# Altium PCB Main.PcbDoc
Units mil, origin at the board's own origin, x right, y up, seen from the top; angles counter-clockwise.
Board outline 2952.76 x 1929.13 mil, 4 copper layers (L1 (Signal), L2 (GND), L3 (PWR), L2 (Signal)), stack 53.912 mil thick; 67 components, 44 nets, 315 pads, 209 vias.
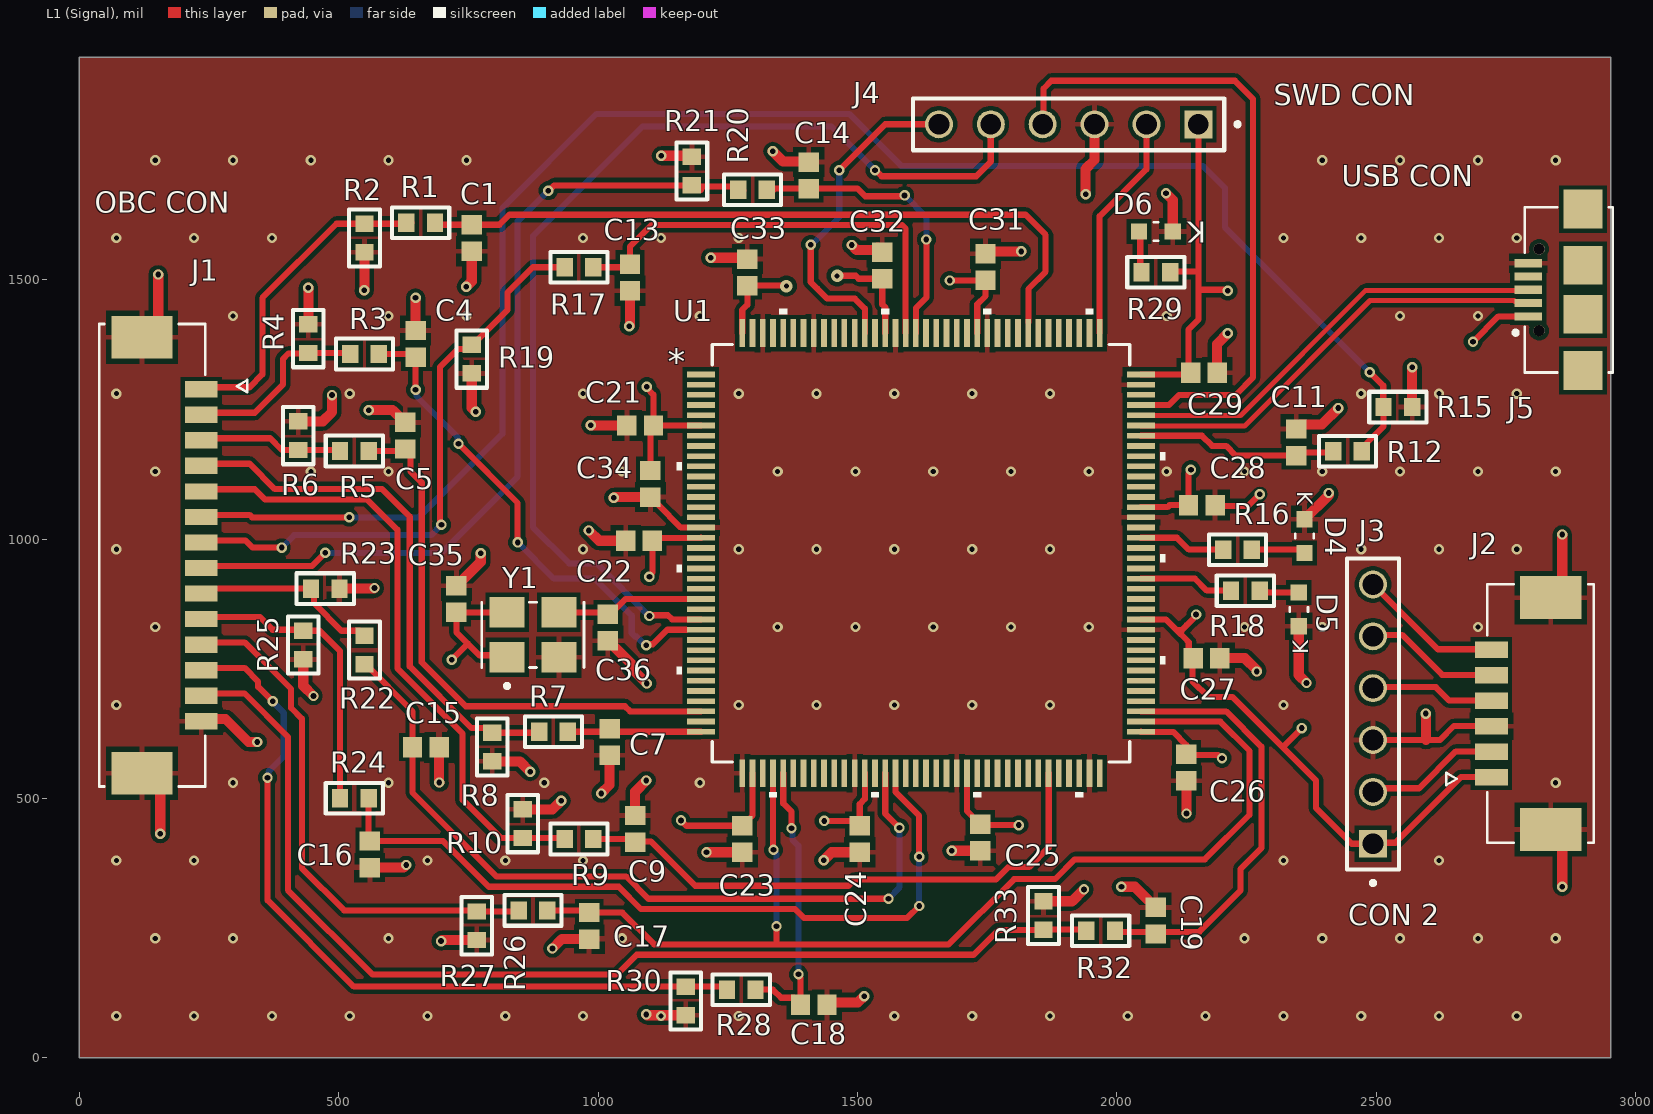
[diagram p0: L1 (Signal) view]
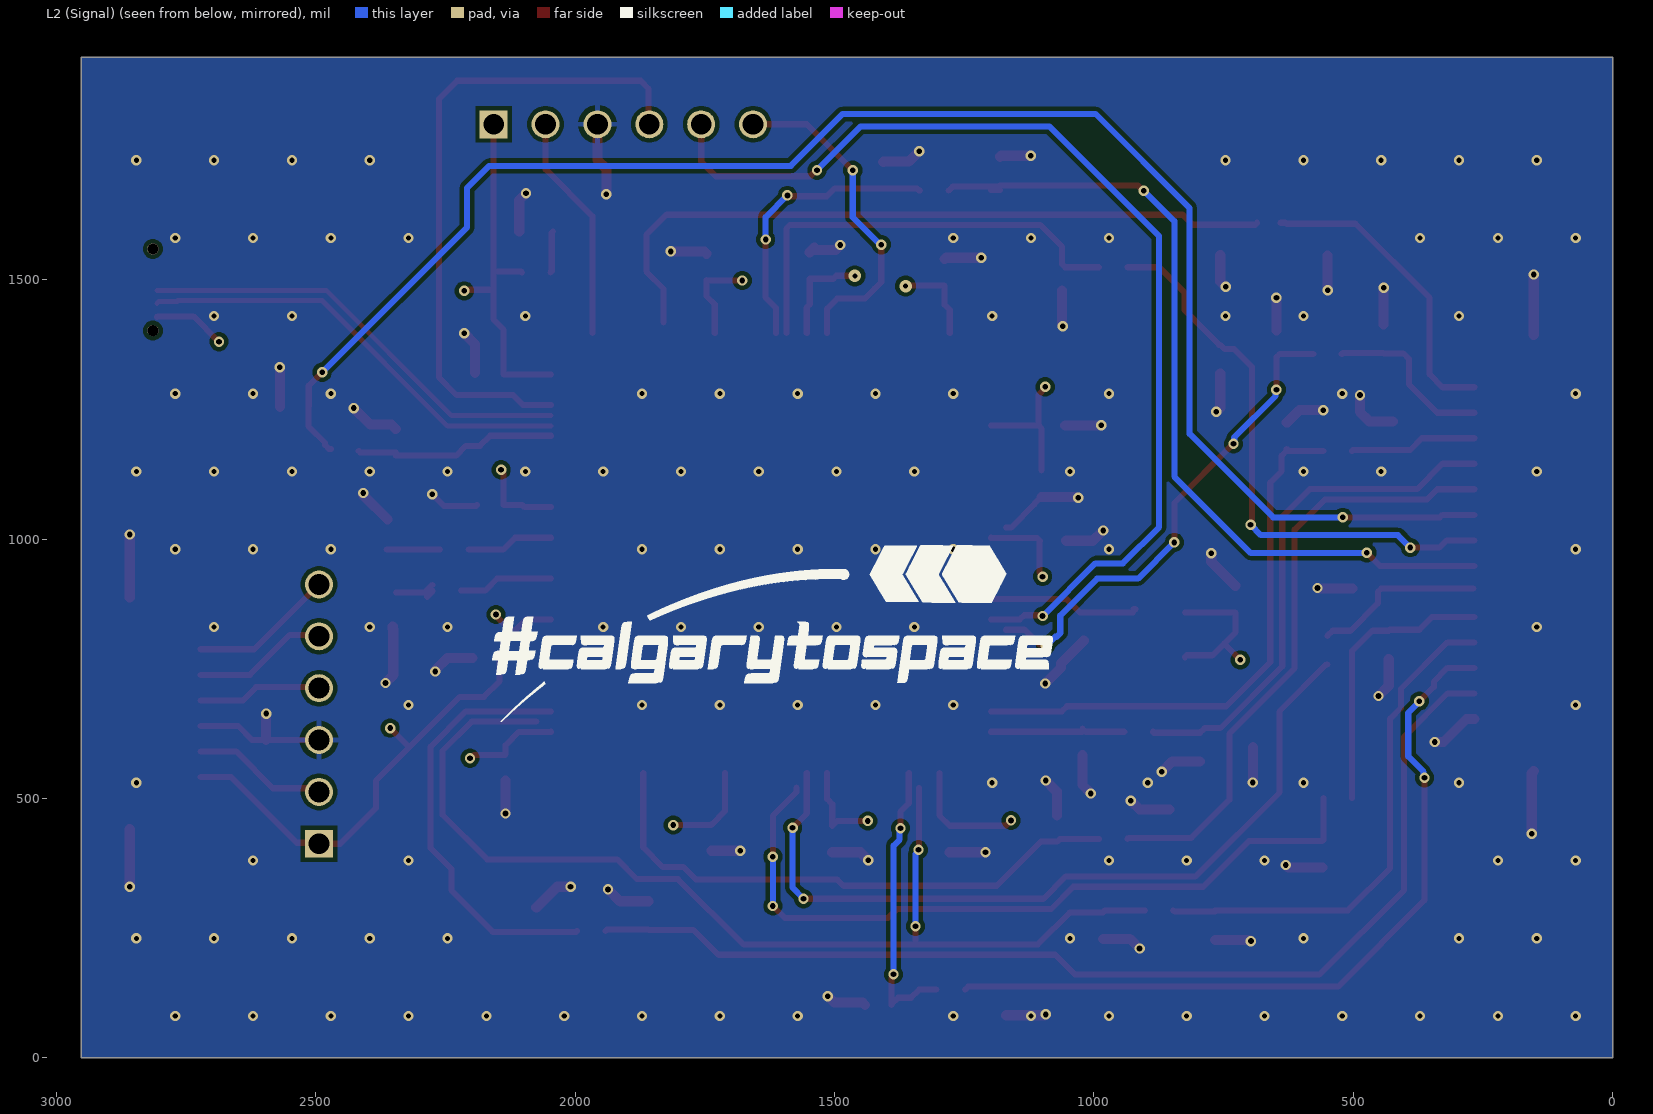
[diagram p1: L2 (Signal) view, seen from below]
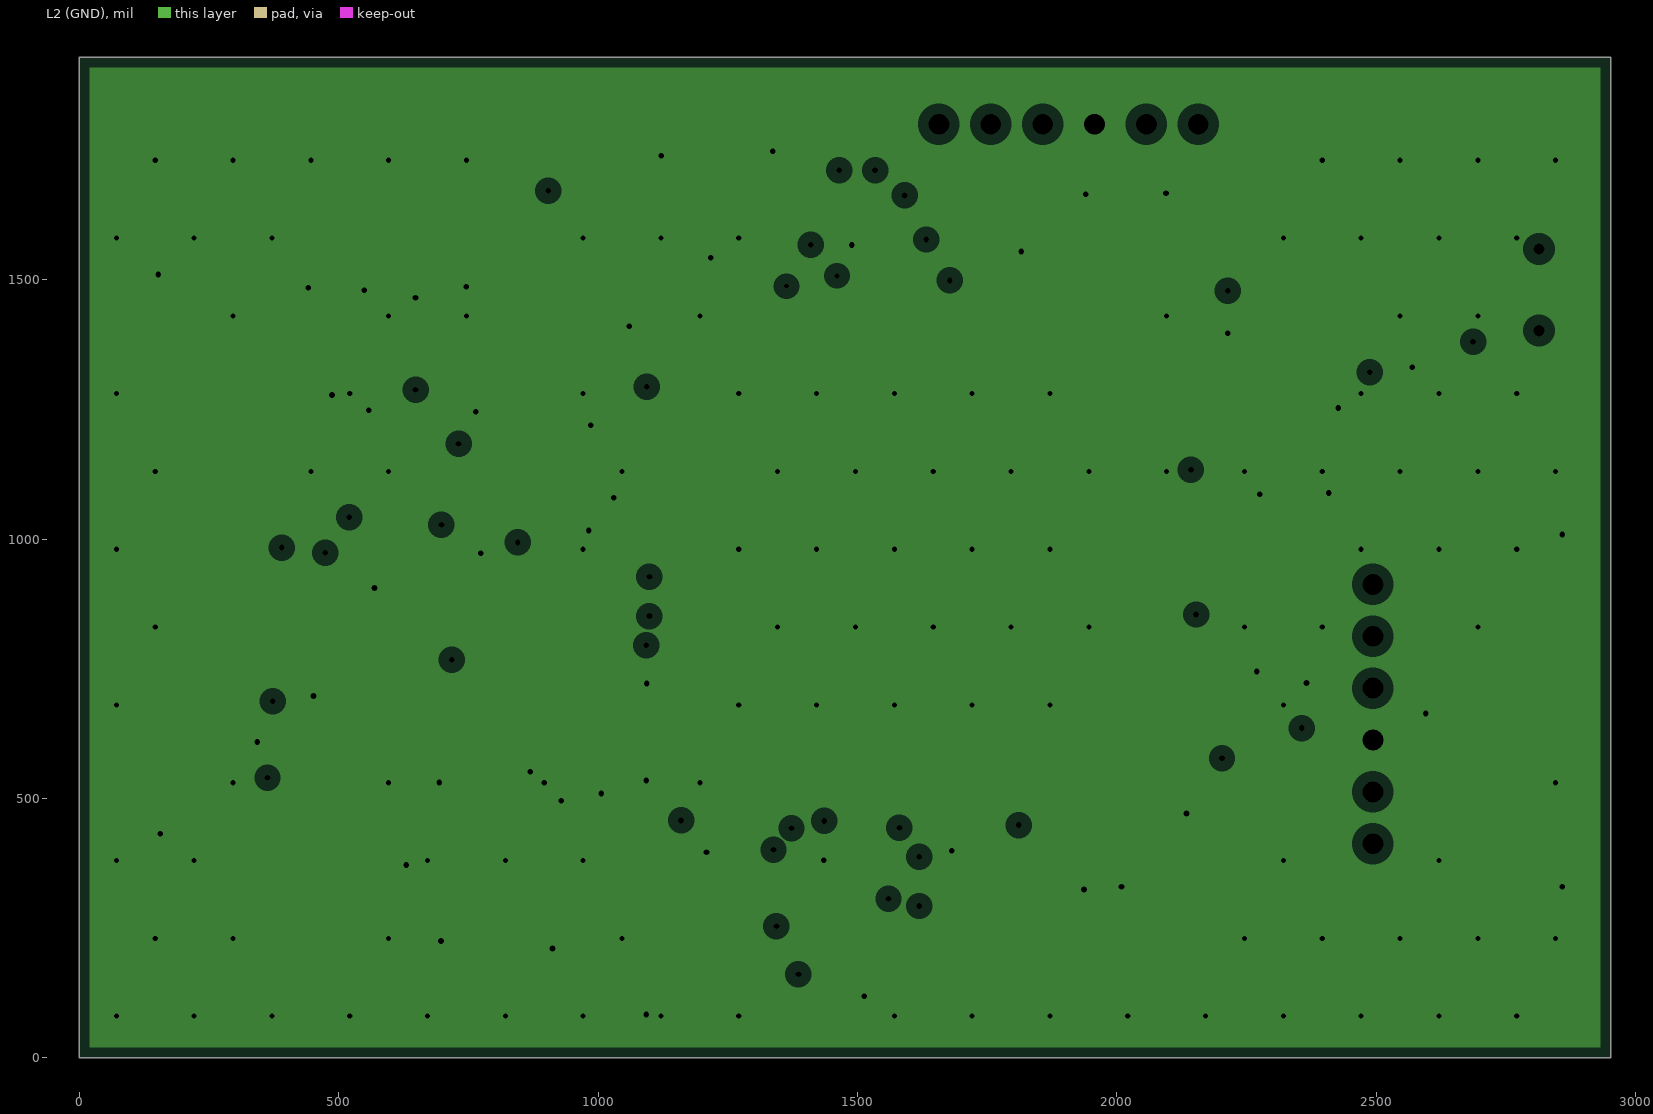
[diagram p2: L2 (GND), clearances drawn from the general rule]
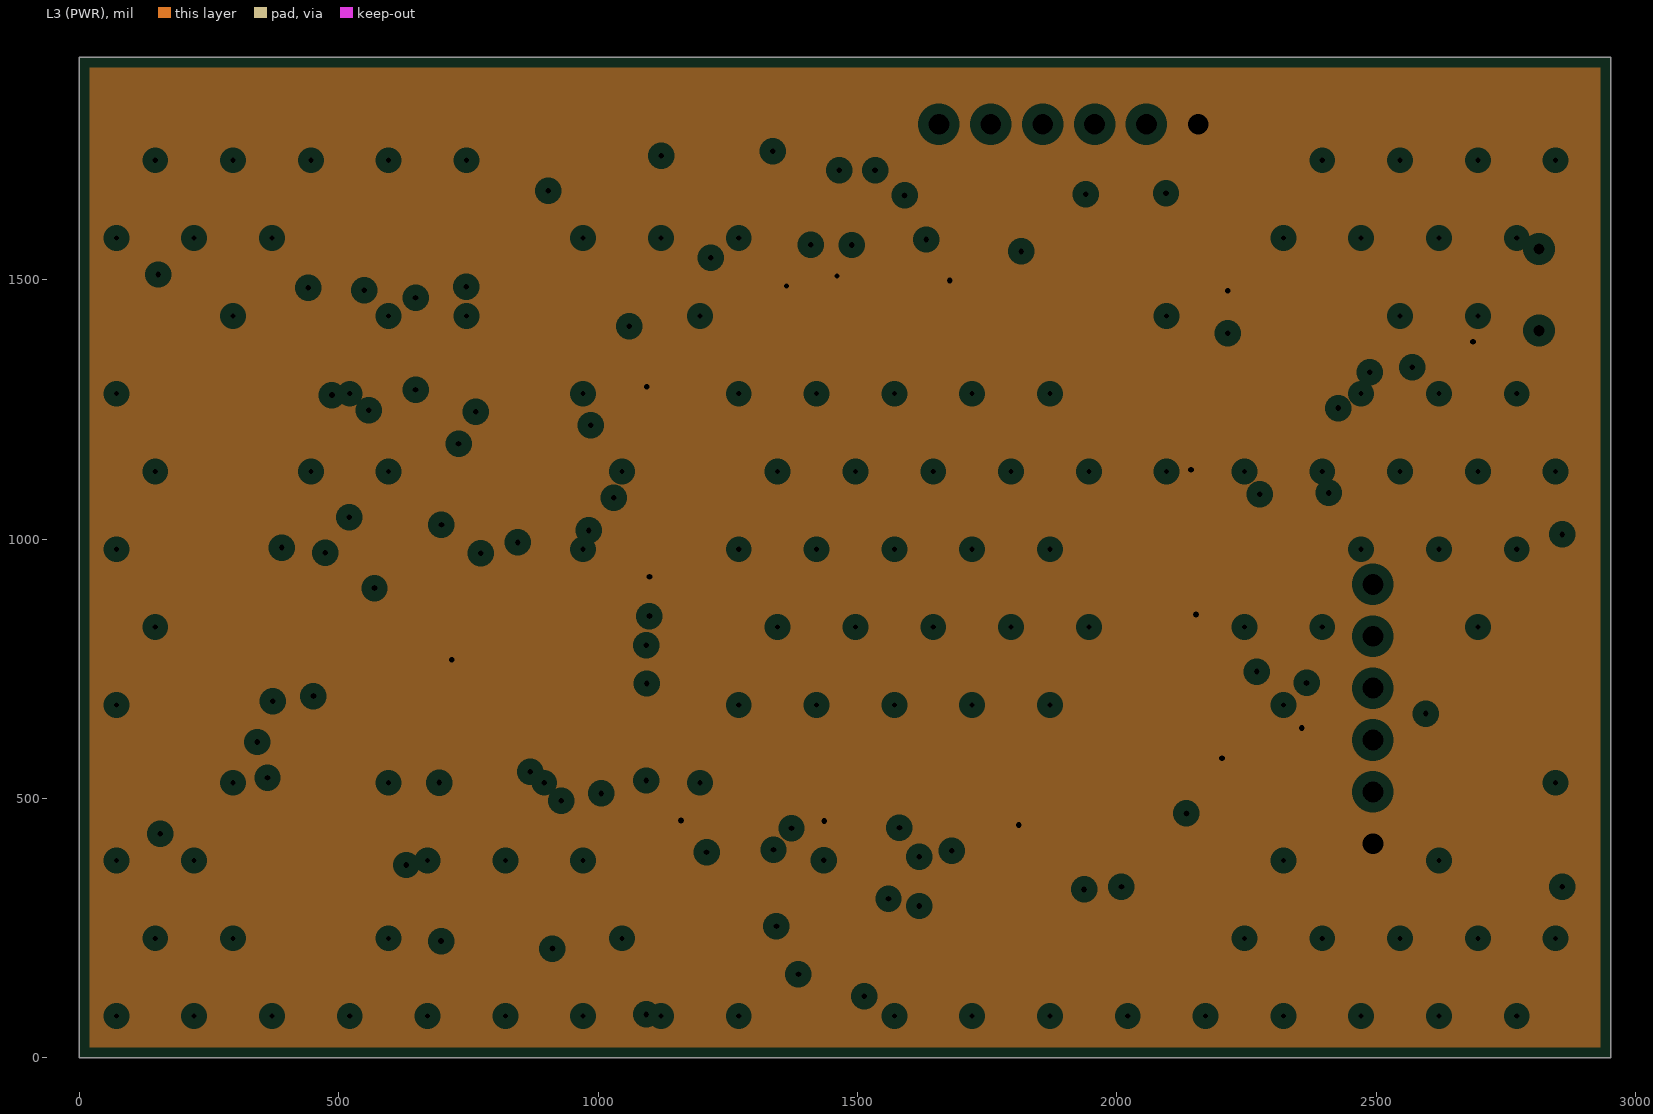
[diagram p3: L3 (PWR), clearances drawn from the general rule]

## Layer stack, top to bottom
Top Solder: solder mask 1, SM-001, Dk 4
L1 (Signal): signal copper 1.378
Dielectric 1: prepreg 5.1, PP-017, Dk 4.3
Dielectric 2: prepreg 5.1, PP-017, Dk 4.3
L2 (GND): plane copper 1.378, net GND
Dielectric 3: core 28, Core-039, Dk 4.8
L3 (PWR): plane copper 1.378, net 3V3
Dielectric 4: prepreg 5.1, PP-017, Dk 4.3
Dielectric 5: prepreg 5.1, PP-017, Dk 4.3
L2 (Signal): signal copper 1.378
Bottom Solder: solder mask 1, SM-001, Dk 4

## Board outline
0,0 2952.76,0 2952.76,1929.13 0,1929.13

## Design rules (kind name [scope] priority, off if disabled: settings)
Clearance [All] p1: gap=8 ignorepadtopadclearanceinfootprint=TRUE except(0: Arc-Hole Track-Hole SMDPad-Hole THPad-Hole Via-Hole Fill-Hole Poly-Hole Region-Hole Text-Hole)
DiffPairsRouting [All] p1: maxlimit=10 minlimit=10 mostfreqgap=10 toplayer_minwidth=9.84 toplayer_maxwidth=15 toplayer_prefwidth=15 bottomlayer_minwidth=9.84 bottomlayer_maxwidth=15 bottomlayer_prefwidth=15 maxuncoupledlength=500
PlaneClearance [All] p1: clearance=20
PlaneConnect [All] p1: planeconnectstyle=Relief reliefexpansion=20 reliefentries=4 reliefconductorwidth=10 reliefairgap=10
PolygonConnect [All] p1: connectstyle=Relief reliefconductorwidth=10 reliefentries=4 polygonreliefangle="90 Angle" airgapwidth=10
RoutingVias [All] p1: holewidth=28 width=50 viastyle="Through Hole" minholewidth=5 minwidth=5 maxholewidth=28 maxwidth=50
SolderMaskExpansion [All] p1: expansion=4 istentingtop=FALSE
Width Power [All] p1: maxlimit=19.68 minlimit=11.81 preferedwidth=19.68 minimp=50.000000 maximp=50.000000 favimp=50.000000
Width [All] p2: maxlimit=10 minlimit=10 preferedwidth=10
27 further rules are at their usual default settings.

## Classes and differential pairs
differential pair USB_D: +USB_D_P -USB_D_N

## Components (designator, comment, footprint, x,y, rotation, side; value= is the part's Value field where it differs from the comment)
C1 "100pF" CAPC1608X95X40NL15T15 756.45,1580.75 r90 top
C4 "100pF" CAPC1608X95X40NL15T15 648.18,1376.9 r270 top
C5 "100pF" CAPC1608X95X40NL15T15 628.5,1199.73 r270 top
C7 "100pF" CAPC1608X95X40NL15T15 1022.2,609.18 r90 top
C9 "100pF" CAPC1608X95X40NL15T15 1071.41,441.86 r270 top
C11 "100pF" CAPC1608X95X40NL15T15 2346,1187 r270 top
C13 "100pF" CAPC1608X95X40NL15T15 1061.57,1504.85 r90 top
C14 "100pF" CAPC1608X95X40NL15T15 1406.06,1701.7 r270 top
C15 "100pF" CAPC1608X95X40NL15T15 667.87,599.34 r180 top
C16 "100pF" CAPC1608X95X40NL15T15 559.6,392.65 r90 top
C17 "100pF" CAPC1608X95X40NL15T15 982.83,254.85 r90 top
C18 "100pF" CAPC1608X95X40NL15T15 1415.9,102.21 r180 top
C19 "100pF" CAPC1608X95X40NL15T15 2075.35,264.69 r270 top
C21 "0.1uF" CAPC1608X95X40NL15T15 1081.25,1219.42 r0 top
C22 "0.1uF" CAPC1608X95X40NL15T15 1079,997 r0 top
C23 "0.1uF" CAPC1608X95X40NL15T15 1278.1,422.17 r90 top
C24 "0.1uF" CAPC1608X95X40NL15T15 1504.48,422.17 r90 top
C25 "0.1uF" CAPC1608X95X40NL15T15 1737,425 r90 top
C26 "0.1uF" CAPC1608X95X40NL15T15 2134.4,559.97 r90 top
C27 "0.1uF" CAPC1608X95X40NL15T15 2173,771 r180 top
C28 "0.1uF" CAPC1608X95X40NL15T15 2164,1066 r180 top
C29 "0.1uF" CAPC1608X95X40NL15T15 2168,1321 r180 top
C31 "0.1uF" CAPC1608X95X40NL15T15 1747,1525 r270 top
C32 "0.1uF" CAPC1608X95X40NL15T15 1548,1528 r270 top
C33 "0.1uF" CAPC1608X95X40NL15T15 1287.94,1514.69 r270 top
C34 "4.7uF" CAPC1608X95X40NL15T15 1101,1107 r90 top
C35 "0.1uF" CAPC1608X95X40NL15T15 726.92,884.77 r90 top
C36 "15pF" CAPC1608X95X40NL15T15 1019,830 r90 top
D4 "D-SML-D12U1WT86" D-SML-D12U1WT86 2362,1006 r270 top
D5 "D-SML-D12U1WT86" D-SML-D12U1WT86 2351,865 r90 top
D6 "D-SML-D12U1WT86" D-SML-D12U1WT86 2075.35,1593.43 r180 top
J1 "J-0532617014" J-532617014 140.51,969.24 r90 top
J2 "J-0532610671" J-0532610671 2817,664 r90 top
J3 "TSW-106-05-T-S" TSW-106-05-T-S 2494,413 r90 top
J4 "TSW-106-05-T-S" TSW-106-05-T-S 2157.24,1800.13 r180 top
J5 "UJ2-MIBH-G-SMT-TR" UJ2-MIBH-G-SMT-TR 2899,1481 r90 top
R1 "22R" 0603 658.02,1610.28 r0 top
R2 "10K" 0603 549.76,1580.75 r90 top
R3 "22R" 0603 549.76,1357.21 r0 top
R4 "10K" 0603 441.49,1386.74 r270 top
R5 "22R" 0603 530.07,1170.2 r0 top
R6 "10K" 0603 421.8,1199.73 r270 top
R7 "22R" 0603 913.93,628.87 r0 top
R8 "10K" 0603 795.82,599.34 r90 top
R9 "22R" 0603 963.14,422.17 r0 top
R10 "10K" 0603 854.87,451.7 r270 top
R12 "22R" 0603 2445,1170 r180 top
R15 "10K" 0603 2542,1255 r180 top
R16 "220R" 0603 2233,980 r180 top
R17 "22R" 0603 963.14,1524.54 r0 top
R18 "220R" 0603 2248,901 r180 top
R19 "10K" 0603 756.45,1347.37 r90 top
R20 "22R" 0603 1298,1674 r0 top
R21 "10K" 0603 1181,1710 r270 top
R22 "22R" 0603 549.76,786.35 r270 top
R23 "10K" 0603 474,905 r180 top
R24 "22R" 0603 530.07,500.91 r0 top
R25 "10K" 0603 431.65,796.19 r90 top
R26 "22R" 0603 874.56,284.38 r0 top
R27 "10K" 0603 766.29,254.85 r90 top
R28 "22R" 0603 1276.13,131.74 r0 top
R29 "220R" 0603 2075.35,1514.69 r0 top
R30 "10K" 0603 1169,110 r90 top
R32 "22R" 0603 1969.05,245.01 r0 top
R33 "10K" 0603 1858.81,274.54 r270 top
U1 "STM32L552ZCT6Q" STM32L552ZCT6Q 1622.59,973.35 r0 top
Y1 "ASFL1-25.000MHZ-L-T" XTAL_ASFL1-25.000MHZ-L-T 874.56,815.87 r90 top

## Footprints (in the part's own frame and the unit in brackets; to place one, negate y for a bottom-side part, rotate by r counter-clockwise, add the part's x,y. Pads: shape width x height; smd on the part's side, far side on the other; paste and mask are expansions set on the pad)
0603 [mm]
  rect 0.8x0.9 smd: 1(-0.7,0) 2(0.7,0)
  silkscreen extent -1.4,-0.75 1.4,0.75, body extent -0.88,-0.48 0.87,0.47, height 1.3
CAPC1608X95X40NL15T15 [mm] "Chip Capacitor, 2-Leads, Body 1.60x0.80mm, IPC Medium Density"
  rect 0.95x1 smd: 1(-0.65,0) 2(0.65,0)
  body extent -0.88,-0.48 0.87,0.47, height 0.95
D-SML-D12U1WT86 [mm]
  rect 0.8x0.8 smd: A(0.825,0) C(-0.825,0)
  silkscreen extent -0.11,-0.45 0.11,0.45, body extent -0.8,-0.4 0.8,0.4, height 0.55
J-0532610671 [mm]
  rect 0.8x1.6 smd mask+0: 1(-3.125,2.4) 2(-1.875,2.4) 3(-0.625,2.4) 4(0.625,2.4) 5(1.875,2.4) 6(3.125,2.4)
  rect 2.1x3 smd mask+0: S1(-5.675,-0.5) S2(5.675,-0.5)
  silkscreen extent -6.32,-2.6 6.32,4.6, body extent -6.32,-2.5 6.32,2.7, height 3.38
J-532617014 [mm]
  rect 0.8x1.6 smd mask+0: 1(8.125,-2.4) 2(6.875,-2.4) 3(5.625,-2.4) 4(4.375,-2.4) 5(3.125,-2.4) 6(1.875,-2.4) 7(0.625,-2.4) 8(-0.625,-2.4) 9(-1.875,-2.4) 10(-3.125,-2.4) 11(-4.375,-2.4) 12(-5.625,-2.4) 13(-6.875,-2.4) 14(-8.125,-2.4)
  rect 2.1x3 smd mask+0: S1(10.675,0.5) S2(-10.675,0.5)
  silkscreen extent -11.32,-4.65 11.32,2.6, body extent -11.32,-2.62 11.32,2.58, height 3.38
STM32L552ZCT6Q [mil]
  rect 53.5x11 smd paste+0 mask+0: 1(-424.25,344.49) 2(-424.25,324.8) 3(-424.25,305.12) 4(-424.25,285.43) 5(-424.25,265.75) 6(-424.25,246.06) 7(-424.25,226.38) 8(-424.25,206.69) 9(-424.25,187.01) 10(-424.25,167.32) 11(-424.25,147.64) 12(-424.25,127.95) 13(-424.25,108.27) 14(-424.25,88.58) 15(-424.25,68.9) 16(-424.25,49.21) 17(-424.25,29.53) 18(-424.25,9.84) 19(-424.25,-9.84) 20(-424.25,-29.53) 21(-424.25,-49.21) 22(-424.25,-68.9) 23(-424.25,-88.58) 24(-424.25,-108.27) 25(-424.25,-127.95) 26(-424.25,-147.64) 27(-424.25,-167.32) 28(-424.25,-187.01) 29(-424.25,-206.69) 30(-424.25,-226.38) 31(-424.25,-246.06) 32(-424.25,-265.75) 33(-424.25,-285.43) 34(-424.25,-305.12) 35(-424.25,-324.8) 36(-424.25,-344.49) 73(424.25,-344.49) 74(424.25,-324.8) 75(424.25,-305.12) 76(424.25,-285.43) 77(424.25,-265.75) 78(424.25,-246.06) 79(424.25,-226.38) 80(424.25,-206.69) 81(424.25,-187.01) 82(424.25,-167.32) 83(424.25,-147.64) 84(424.25,-127.95) 85(424.25,-108.27) 86(424.25,-88.58) 87(424.25,-68.9) 88(424.25,-49.21) 89(424.25,-29.53) 90(424.25,-9.84) 91(424.25,9.84) 92(424.25,29.53) 93(424.25,49.21) 94(424.25,68.9) 95(424.25,88.58) 96(424.25,108.27) 97(424.25,127.95) 98(424.25,147.64) 99(424.25,167.32) 100(424.25,187.01) 101(424.25,206.69) 102(424.25,226.38) 103(424.25,246.06) 104(424.25,265.75) 105(424.25,285.43) 106(424.25,305.12) 107(424.25,324.8) 108(424.25,344.49)
  rect 11x53.5 smd paste+0 mask+0: 37(-344.49,-424.25) 38(-324.8,-424.25) 39(-305.12,-424.25) 40(-285.43,-424.25) 41(-265.75,-424.25) 42(-246.06,-424.25) 43(-226.38,-424.25) 44(-206.69,-424.25) 45(-187.01,-424.25) 46(-167.32,-424.25) 47(-147.64,-424.25) 48(-127.95,-424.25) 49(-108.27,-424.25) 50(-88.58,-424.25) 51(-68.9,-424.25) 52(-49.21,-424.25) 53(-29.53,-424.25) 54(-9.84,-424.25) 55(9.84,-424.25) 56(29.53,-424.25) 57(49.21,-424.25) 58(68.9,-424.25) 59(88.58,-424.25) 60(108.27,-424.25) 61(127.95,-424.25) 62(147.64,-424.25) 63(167.32,-424.25) 64(187.01,-424.25) 65(206.69,-424.25) 66(226.38,-424.25) 67(246.06,-424.25) 68(265.75,-424.25) 69(285.43,-424.25) 70(305.12,-424.25) 71(324.8,-424.25) 72(344.49,-424.25) 109(344.49,424.25) 110(324.8,424.25) 111(305.12,424.25) 112(285.43,424.25) 113(265.75,424.25) 114(246.06,424.25) 115(226.38,424.25) 116(206.69,424.25) 117(187.01,424.25) 118(167.32,424.25) 119(147.64,424.25) 120(127.95,424.25) 121(108.27,424.25) 122(88.58,424.25) 123(68.9,424.25) 124(49.21,424.25) 125(29.53,424.25) 126(9.84,424.25) 127(-9.84,424.25) 128(-29.53,424.25) 129(-49.21,424.25) 130(-68.9,424.25) 131(-88.58,424.25) 132(-108.27,424.25) 133(-127.95,424.25) 134(-147.64,424.25) 135(-167.32,424.25) 136(-187.01,424.25) 137(-206.69,424.25) 138(-226.38,424.25) 139(-246.06,424.25) 140(-265.75,424.25) 141(-285.43,424.25) 142(-305.12,424.25) 143(-324.8,424.25) 144(-344.49,424.25)
  silkscreen extent -471,-471 471,471, body extent -437,-437 437,437, height 63
TSW-106-05-T-S [mm] "CONN HEADER VERT 6POS 2.54MM"
  rect 1.37x1.37 hole 1.02: 01(0,0)
  round 1.37 hole 1.02: 02(2.54,0) 03(5.08,0) 04(7.62,0) 05(10.16,0) 06(12.7,0)
  silkscreen extent -2.02,-1.27 13.97,1.27
UJ2-MIBH-G-SMT-TR [mm]
  rect 0.4x1.35 smd: 1(-1.3,2.675) 2(-0.65,2.675) 3(0,2.675) 4(0.65,2.675) 5(1.3,2.675)
  rect 1.9x1.9 smd: S1(-3.95,0) S2(-1.2,0) S3(1.2,0) S4(3.95,0)
  round 0.55 hole 0.55 unplated: ""(-2,2.15) ""(2,2.15)
  silkscreen extent -4.05,-1.45 4.05,3.4
XTAL_ASFL1-25.000MHZ-L-T [mm]
  rect 1.5x1.7 smd: 1(-1.1,1.27) 2(-1.1,-1.27) 3(1.1,-1.27) 4(1.1,1.27)
  silkscreen extent -2.6,-2.5 1.6,2.5

## Part data
C1 C4 C5 C7 C9 C11 C13 C14 C15 C16 C17 C18 C19 C21 C22 C23 C24 C25 C26 C27 C28 C29 C31 C32 C33 C34 C35 C36: library part CMP-1035-01267-2, Manufacturer=Vitramon, Part Number=VJ0603A101FXACW1BC
D4 D5 D6: "Red 620nm LED Indication - Discrete 2.2V 0603 _1608 Metric", Manufacturer="Rohm Semiconductor", Manufacturer Part #=SML-D12U1WT86, Distributor=Digikey, Distributor Part #=SML-D12U1WT86CT-ND
J1: "Connector Header Surface Mount, Right Angle 14 position 0.049 (1.25mm)", Manufacturer=Molex, Manufacturer Part #=0532617014, Distributor=Digikey, Distributor Part #=900-0532617014CT-ND, SnapEDA_Link=https://www.snapeda.com/parts/532617014/Molex/view-part/5064407/?ref=snap
J2: "CONN HEADER SMD R/A 6POS 1.25MM", Distributor=Digi-Key, Distributor Part #=WM7624CT-ND, Manfacturer=Molex, Manfacturer Part #=0532610671
J3 J4: "CONN HEADER VERT 6POS 2.54MM", Package=None, Availability=Unavailable, MF=Samtec, MP=TSW-106-05-T-S, Price=None
J5: "USB JACK, 2.0, MICRO B TYPE, 5 P", Package=None, Availability="In Stock", Check_prices=https://www.snapeda.com/parts/UJ2-MIBH-G-SMT-TR/CUI+Devices/view-part/?ref=eda, CUI_purchase_URL=https://www.cuidevices.com/product/interconnect/connectors/usb-connectors/uj2-mibh-g-smt-tr?utm_source=snapeda.com&utm_medium=referral&utm_campaign=snapedaBOM, MF="CUI Devices", MP=UJ2-MIBH-G-SMT-TR, Price=None, Purchase-URL=https://pricing.snapeda.com/search/part/UJ2-MIBH-G-SMT-TR/?ref=eda, SnapEDA_Link=https://www.snapeda.com/parts/UJ2-MIBH-G-SMT-TR/CUI+Devices/view-part/?ref=snap
R1 R3 R5 R7 R9 R12 R17 R20 R22 R24 R26 R28 R32: library part RT-22R0-F-1/16W-0603, "22 Ohms ±0.5% 0.063W, 1/16W Chip Resistor 0603 (1608 Metric) - Thin Film", Manufacturer=Susumu, Manufacturer Part #=RR0816Q-220-D, ComponentLink1description=Datasheet, ComponentLink1URL=https://www.vishay.com/docs/20035/dcrcwe3.pdf, ComponentLink2description="Manufacturer Website", ComponentLink2URL=https://www.vishay.com/, Distributor=Digikey, Distributor Part #=RR08Q22DCT-ND, Part Description="22 Ohms ±0.5% 0.063W, 1/16W Chip Resistor 0603 (1608 Metric) - Thin Film"
R2 R4 R6 R8 R10 R15 R19 R21 R23 R25 R27 R30 R33: library part RT-10K0-F-1/16W-0603, "10 kOhms ±0.1% 0.063W, 1/16W Chip Resistor 0603 (1608 Metric) - Thin Film", Manufacturer="TE Connectivity Passive Product", Manufacturer Part #=CPF0603B10KE, ComponentLink1description=Datasheet, ComponentLink1URL=https://www.vishay.com/docs/20035/dcrcwe3.pdf, ComponentLink2description="Manufacturer Website", ComponentLink2URL=https://www.vishay.com/, Distributor=Digikey, Distributor Part #=A119886CT-ND, Part Description="10 kOhms ±0.1% 0.063W, 1/16W Chip Resistor 0603 (1608 Metric) - Thin Film"
R16 R18 R29: library part RT-220R-F-1/16W-0603, "220 Ohms ±0.5% 0.063W, 1/16W Chip Resistor 0603 (1608 Metric) - Thin Film", Manufacturer=Susumu, Manufacturer Part #=RR0816P-221-D, Distributor=Digikey, Distributor Part #=RR08P220DCT-ND, Part Description="220 Ohms ±0.5% 0.063W, 1/16W Chip Resistor 0603 (1608 Metric) - Thin Film"
U1: "IC MCU 32BIT 256KB FLASH 144LQFP", Mfr_Name=STMicroelectronics, Copyright="Copyright (C) 2023 Ultra Librarian. All rights reserved.", Digi-Key_Part_Number_1=497-STM32L552ZCT6Q-ND, Manufacturer_Part_Number=STM32L552ZCT6Q, RefDes=RefDes, Type=DEV
Y1: "XTAL OSC XO 25.0000MHZ HCMOS TTL", Package=None, Availability=Unavailable, MP=ASFL1-25.000MHZ-L-T, Price=None

## Via types
v1: diameter 19.68, hole 9.84, L1 (Signal) to L2 (Signal), tented both sides, 117 vias
v2: diameter 20, hole 11, L1 (Signal) to L2 (Signal), tented both sides, 90 vias
v3: diameter 23.62, hole 9.84, L1 (Signal) to L2 (Signal), tented both sides, 2 vias

## Nets (pads, with @x,y where several pads share a name; then routed paths per layer and width w, separated by ;. In a path a pad name is that pad's centre, name@x,y a point inside that pad or via, vN(x,y) a via of type N, cw(c..) or ccw(c..) an arc to the next point about the centre after c; other vN are vias at no path point)
3V3: C21.2 C22.2 C23.2 C24.2 C25.2 C26.2 C27.2 C28.2 C29.2 C31.2 C32.2 C33.2 C34.2 C35.1 J2.1 J3.01 J4.01 J5.1 R29.2 U1.6 U1.17 U1.38 U1.49 U1.59 U1.73 U1.84 U1.95 U1.108 U1.121 U1.130 U1.144 Y1.1 Y1.4 | length 4133.1
  L1 (Signal) w11.81: v2(718,767.58) 749,798.58 ; Y1.1 820.62,776.5 771.08,776.5 749,798.58 ; Y1.4 C35.1 726.92,820.66 749,798.58 ; v2(1094,1294) 1094,1291.78 1106.84,1278.94 C21.2 ; v2(1099,928) 1099,930.22 1105,936.22 1105,996.59 C22.2 1110.19,1002.6 1198.06,1002.6 U1.17 ; C34.2 1101,1213.57 C21.2 ; v2(1160,458) 1170.24,447.76 C23.2 1297.79,467.45 U1.38 ; U1.6 C21.2 ; U1.144 1278.1,1442.32 1287.94,1452.16 C33.2 1361.9,1489.1 v3(1363,1488) ; v2(1436,457) 1495.24,457 C24.2 1504.48,489.63 1514.32,499.47 U1.49 ; v3(1461,1508) 1496.78,1508 1502.37,1502.41 C32.2 1548,1452.93 1553.69,1447.24 U1.130 ; v2(1678,1499) 1746.59,1499 C31.2 1747,1468.94 1731.14,1453.08 1731.14,1397.88 U1.121 ; U1.59 1711.17,476.42 1723.22,464.37 1723.22,463.39 1736.02,450.59 C25.2 1738.61,448.98 v2(1811,449) ; U1.73 2047.09,628.61 2109.06,628.61 2134.4,603.28 C26.2 2135.96,584 2194.78,584 2200.78,578 v2(2203,578) ; U1.84 2047.12,845.12 2095.29,845.12 2115.7,824.71 ; U1.95 2097.94,1061.94 2102,1066 C28.2 2138.41,1127.19 2143,1131.78 v2(2143,1134) ; U1.108 2138.34,1317.84 2138.34,1404.34 2157.93,1423.93 2157.93,1481 ; R29.2 2104.21,1516 2157.93,1516 ; v2(2153,855) 2153,852.78 2134.73,834.51 2134.73,833.95 2125.49,824.71 2115.7,824.71 ; J4.01@2157.93,1799.43 2157.93,1516 ; v2(2214,1479) 2212.43,1480.57 2206.64,1480.57 2206.21,1481 2157.93,1481 ; v2(2357,636) 2320,599 ; v2(2687,1381) 2735.82,1429.82 2805.68,1429.82 J5.1@2806.68,1428.82 ; J2.1@2722.51,541.84 2663.84,541.84 2536.89,414.89 2495.89,414.89 J3.01 2453,413 2384,482 2384,535 2320,599 ; 2115.7,824.71 2135.5,804.91 2138.93,801.48 2138.93,784.47 2146.41,776.98 2146.41,725.59 2176,696 2223,696 2320,599 ; 2157.93,1481 2157.93,1516
GND: C1.1 C4.1 C5.1 C7.1 C9.1 C11.1 C13.1 C14.1 C15.1 C16.1 C17.1 C18.1 C19.1 C21.1 C22.1 C23.1 C24.1 C25.1 C26.1 C27.1 C28.1 C29.1 C31.1 C32.1 C33.1 C34.1 C35.2 C36.1 D4.C D5.C D6.C J1.14 J1.S1 J1.S2 J2.3 J2.S1 J2.S2 J3.03 J4.03 J5.5 R2.1 R4.1 R6.1 R8.1 R10.1 R15.1 R19.1 R21.1 R23.1 R25.1 R27.1 R30.1 R33.1 U1.16 U1.37 U1.48 U1.58 U1.71 U1.83 U1.94 U1.107 U1.120 U1.129 U1.137 U1.142 Y1.2 | length 4507.2
  L1 (Signal) w11.81: C34.1 1101.98,1081.41 1114.78,1068.61 1114.78,1067.63 1159.84,1022.57 1169.83,1022.57 ; C28.1 2191.59,1064 2253,1064 v2(2276,1087) ; J3.03 2596.12,613 2623,613 2650.27,640.27 J2.3@2722.51,640.27
  L1 (Signal) w19.68: J1.S2@151.92,553.08 156.06,548.95 v2(156.06,432.02) ; J1.S1@151.92,1393.63 v2(151.92,1510.47) ; J1.14@266.09,653.47 281.84,653.47 326.13,609.18 v2(343.06,609.18) ; R6.1@423.77,1227.29 469.05,1227.29 486.94,1245.18 486.94,1277.94 v2(487,1278) ; R25.1 431.65,717.45 v2(451.33,697.76) ; R4.1 v2(441.49,1485.17) ; R23.1 567.91,905 v2(569,906) v2(569,906) ; v2(549,1480) 549,1480.09 549.76,1480.84 R2.1@549.76,1547.28 ; v2@558.09,1249 603.83,1249 627.51,1225.32 C5.1 ; C16.1 624.97,367.06 v2(630,372) v2(630,372) ; C4.1 v2(648.18,1465.48) ; C15.1 693.46,531.63 694,531.09 v2(694,531) ; v2(697.39,225.32) 697.48,225.32 699.45,227.29 R27.1 ; C35.2 727.91,910.36 773.94,956.4 773.94,972.94 v2(774,973) ; v2(746,1487) 746,1487.09 756.45,1497.53 C1.1@756.45,1548.16 ; R19.1 756.45,1253.64 764,1246.09 v2(764,1246) ; R8.1 849.14,571.78 v2(869,552) v2(869,552) ; R10.1 912.17,479.26 v2(929,496) v2(929,496) ; v2(912,211) 912.09,211 930.35,229.26 C17.1 ; v2(982,1017) 982.09,1017 1002.09,997 C22.1 ; v2(986,1220) 986.09,1220 986.67,1219.42 C21.1 ; v2(1006,510) 1006,510.09 1022.2,526.28 C7.1 ; C36.1 1019.98,804.41 1063.29,761.11 1063.29,752.71 v2(1094,722) ; v2(1030,1080) 1030.09,1080 1031.49,1081.41 C34.1 ; v2(1060,1411) 1060,1411.09 1061.57,1412.65 C13.1 ; C9.1 1071.41,513.41 v2(1093,535) ; v2(1093,84) 1093.09,84 1094.64,82.44 R30.1 ; v2(1121.94,1739.53) v2(1121.94,1739.53) 1179.09,1739.47 R21.1 ; v2(1209.2,396.58) C23.1 ; v2(1217,1543) 1217.06,1542.94 1285.29,1542.94 C33.1 ; v2(1337,1748) 1337.09,1748 1356.84,1728.24 1405.1,1728.24 C14.1 ; v2(1435,381) 1435.09,381 1450.67,396.58 C24.1 ; C18.1 1446.49,107.22 1501.13,107.22 v2(1513,119) v2(1513,119) ; v2(1488.94,1567.37) 1489.03,1567.37 1498.79,1557.61 1538.16,1557.61 1539.14,1558.6 1539.14,1562.45 C32.1 ; v2(1681.97,399.41) C25.1 ; C31.1 1751.35,1554.94 1815.94,1554.94 v2(1816,1555) ; R33.1 1914.01,302.09 v2(1937,325) v2(1937,325) ; v2(1940,1665) 1940,1714.15 1957.24,1731.39 J4.03 ; v2(2009.06,329.94) 2034.71,329.94 2074.36,290.28 C19.1 ; v2(2095,1667) 2095,1666.91 2107.83,1654.09 D6.C ; v2(2134.4,471.39) C26.1 ; C29.1 2193.59,1376.51 2214,1396.91 v2(2214,1397) ; C27.1 2246.82,771 2269.94,747.88 2269.94,745.06 v2(2270,745) ; C11.1 2354.71,1221.3 2395.3,1221.3 v2(2427,1253) ; D5.C@2352,831.52 2352,827.61 2351,826.61 2351,738.09 2366,723.09 v2(2366,723) ; D4.C 2408.69,1085.17 2408.69,1089.26 v2(2408.75,1089.32) ; R15.1 v2(2569.56,1331.77) ; 2596.12,613 2596.12,663.66 2596.06,663.72 2596.06,663.85 v2@2596.1,663.9 ; v2(2858.96,330.23) J2.S1@2858.96,441.45 ; J2.S2@2858.96,888.3 v2(2858.96,1009.36)
  other v1: 71.26,80.71 221.26,80.71 371.26,80.71 521.26,80.71 671.26,80.71 821.26,80.71 971.26,80.71 1121.26,80.71 1271.26,80.71 1571.26,80.71 1721.26,80.71 1871.26,80.71 2021.26,80.71 2171.26,80.71 2321.26,80.71 2471.26,80.71 2621.26,80.71 2771.26,80.71 146.26,230.71 296.26,230.71 596.26,230.71 1046.26,230.71 2246.26,230.71 2396.26,230.71 2546.26,230.71 2696.26,230.71 2846.26,230.71 71.26,380.71 221.26,380.71 671.26,380.71 821.26,380.71 971.26,380.71 2321.26,380.71 2621.26,380.71 296.26,530.71 596.26,530.71 896.26,530.71 1196.26,530.71 2846.26,530.71 71.26,680.71 1271.26,680.71 1421.26,680.71 1571.26,680.71 1721.26,680.71 1871.26,680.71 2321.26,680.71 146.26,830.71 1346.26,830.71 1496.26,830.71 1646.26,830.71 1796.26,830.71 1946.26,830.71 2246.26,830.71 2396.26,830.71 2696.26,830.71 71.26,980.71 971.26,980.71 1271.26,980.71 1421.26,980.71 1571.26,980.71 1721.26,980.71 1871.26,980.71 2471.26,980.71 2621.26,980.71 2771.26,980.71 146.26,1130.71 446.26,1130.71 596.26,1130.71 1046.26,1130.71 1346.26,1130.71 1496.26,1130.71 1646.26,1130.71 1796.26,1130.71 1946.26,1130.71 2096.26,1130.71 2246.26,1130.71 2396.26,1130.71 2546.26,1130.71 2696.26,1130.71 2846.26,1130.71 71.26,1280.71 521.26,1280.71 971.26,1280.71 1271.26,1280.71 1421.26,1280.71 1571.26,1280.71 1721.26,1280.71 1871.26,1280.71 2471.26,1280.71 2621.26,1280.71 2771.26,1280.71 296.26,1430.71 596.26,1430.71 746.26,1430.71 1196.26,1430.71 2096.26,1430.71 2546.26,1430.71 2696.26,1430.71 71.26,1580.71 221.26,1580.71 371.26,1580.71 971.26,1580.71 1121.26,1580.71 1271.26,1580.71 2321.26,1580.71 2471.26,1580.71 2621.26,1580.71 2771.26,1580.71 146.26,1730.71 296.26,1730.71 446.26,1730.71 596.26,1730.71 746.26,1730.71 2396.26,1730.71 2546.26,1730.71 2696.26,1730.71 2846.26,1730.71
  other v2: 2596,664 558,1249
I2C1_SCL: C13.2 R17.2 U1.128 | length 859.9
  L1 (Signal) w11.81: R17.2 1055.66,1524.54 C13.2 1061.57,1563.91 1103.66,1606 1586.02,1606 1592.94,1599.08 U1.128@1592.94,1397.6
I2C1_SDA: C14.2 R20.2 U1.127 | length 555.4
  L1 (Signal) w11.81: R20.2@1335.19,1672.17 1337.16,1672.17 1341.09,1676.11 C14.2 1500.54,1676.11 1515.22,1661.43 1589.43,1661.43 v2(1591,1663) ; U1.127 1612.75,1445.8 1633,1466.05 v2(1633,1578)
  L2 (Signal) w11.81: v2(1591,1663) 1633,1621 v2(1633,1578)
I2C2_SCL: C15.2 R22.2 U1.51 | length 1551.2
  L1 (Signal) w11.81: R22.2 551.72,758.79 642.28,668.24 C15.2 642.28,511.72 804,350 1054,350 1097,307 v2(1560,307) ; U1.51 1553.69,471.31 v2(1581,444)
  L2 (Signal) w11.81: v2(1560,307) 1560,307.33 1581,328.33 v2(1581,444)
I2C2_SDA: C16.2 R24.2 U1.52 | length 1460.8
  L1 (Signal) w11.81: R24.2 557.63,420.2 C16.2 701.33,418.24 789.57,330 1040,330 1082.81,287.19 1379.81,287.19 1397,270 1596,270 v2(1619,293) ; 1573.5,521 1573.5,512.5 1619.12,466.88 1619.12,388.12 v2(1619,388)
  L2 (Signal) w11.81: v2(1619,293) v2(1619,388)
NetD4_A: D4.A R16.1 | length 102.8
  L1 (Signal) w11.81: R16.1 D4.A@2363.37,980
NetD5_A: D5.A R18.1 | length 91.6
  L1 (Signal) w11.81: R18.1 2275.56,899.03 R18.1@2285.4,889.19 ; R18.1@2275.56,912 2289.99,897.57 D5.A@2345.25,897.57
NetD6_A: D6.A R29.1 | length 80.8
  L1 (Signal) w11.81: D6.A 2045.33,1590.97 2045.33,1517.15 R29.1
NetJ1_1: J1.1 R1.1 R2.2 | length 592
  L1 (Signal) w11.81: J1.1@266.09,1293.24 328.3,1293.24 352.91,1317.84 352.91,1465.48 495.73,1608.31 628.5,1608.31 R1.1 R1.1@640.31,1610.28
NetJ1_2: J1.2 R3.1 R4.2 | length 333.4
  L1 (Signal) w11.81: J1.2@266.09,1244.02 338.14,1244.02 392.28,1298.16 392.28,1347.37 403.13,1358.23 440.53,1358.23 R4.2 520.23,1359.18 R3.1
NetJ1_3: J1.3 R5.1 R6.2 | length 246.6
  L1 (Signal) w11.81: J1.3@266.09,1194.81 367.67,1194.81 390.31,1172.17 419.83,1172.17 420.82,1172.17 R6.2 500.54,1172.17 R5.1
NetJ1_4: J1.4 R7.1 R8.2 | length 1005
  L1 (Signal) w11.81: J1.4@266.09,1145.6 328.3,1145.6 377.09,1096.81 583.78,1096.81 637,1043.59 637,755 756.01,635.99 786.73,635.99 R8.2 884.4,626.9 R7.1
NetJ1_5: J1.5 R9.1 R10.2 | length 1180.3
  L1 (Signal) w11.81: J1.5@266.09,1096.39 338.14,1096.39 357.53,1077 554.38,1077 613,1018.38 613,750.98 738.73,625.25 738.73,497.43 812.02,424.14 R10.2 933.61,424.14 R9.1
NetJ1_6: J1.6 R12.1 R15.2 | length 3229.6
  L1 (Signal) w11.81: J1.6@266.09,1047.17 328.3,1047.17 333.22,1042.25 v2(520.23,1042.25) ; R12.1@2471.09,1174.33 2474.92,1174.33 2482.4,1181.81 2482.4,1185.64 2514.44,1217.68 R15.2 ; v2(2488,1322) 2513.78,1296.22 R15.2@2513.78,1255.66
  L2 (Signal) w11.81: v2(520.23,1042.25) 654.25,1042.25 815.5,1203.5 815.5,1638.5 997,1820 1484.61,1820 1584.61,1720 2166,1720 2209,1677 2209,1601 v2(2488,1322)
NetJ1_7: J1.7 R17.1 R19.2 | length 1101.1
  L1 (Signal) w11.81: J1.7@266.09,997.96 319.96,997.96 333.92,984 v2(390,984) ; v2(698,1028) 696.43,1029.57 696.43,1035.36 695,1036.79 695,1332 729.74,1366.74 748.26,1366.74 R19.2 758.42,1374.93 825.35,1441.86 825.35,1475.32 874.56,1524.54 R17.1
  L2 (Signal) w11.81: v2(390,984) 414,1008 678,1008 v2(698,1028)
NetJ1_8: J1.8 R20.1 R21.2 | length 1628.3
  L1 (Signal) w11.81: J1.8@266.09,948.75 448.75,948.75 v2(474,974) ; v2(904.09,1672.17) 904.83,1672.17 915.1,1682.44 R21.2 1183.44,1680 1272.24,1680 R20.1@1280.07,1672.17 ; R21.2@1181,1673.16 R21.2@1198.38,1673.16
  L2 (Signal) w11.81: v2(474,974) 474.65,973.35 697.39,973.35 845.03,1120.99 845.03,1613.12 v2(904.09,1672.17)
NetJ1_9: J1.9 R22.1 R23.2 | length 332
  L1 (Signal) w11.81: 268.6,905 R23.2 452.51,898.93 452.51,876.49 505.25,823.75 539.91,823.75 R22.1
NetJ1_10: J1.10 R24.1 R25.2 | length 547.2
  L1 (Signal) w11.81: J1.10@266.09,850.32 347.98,850.32 372.59,825.72 429.68,825.72 R25.2 463.14,823.75 502.51,784.38 R24.1
NetJ1_11: J1.11 R26.1 R27.2 | length 986
  L1 (Signal) w11.81: J1.11@266.09,801.11 318.46,801.11 408,711.57 408,675 429,654 429,365.76 510.39,284.38 R27.2@766.29,284.38 ; R27.2 845.03,282.41 R26.1
NetJ1_12: J1.12 R28.1 R30.2 | length 1501.6
  L1 (Signal) w11.81: J1.12@266.09,751.9 318.46,751.9 344.74,725.61 344.74,715.77 v2(372.59,687.92) ; v2(362.75,540.28) 362.75,304.06 529.19,137.62 1242.7,137.62 R28.1
  L2 (Signal) w11.81: v2(362.75,540.28) 364.31,541.85 364.31,551.69 394,581.38 394,665.34 372.59,686.75 v2(372.59,687.92)
NetJ1_13: J1.13 R32.1 R33.2 | length 2109.6
  L1 (Signal) w11.81: J1.13@266.09,702.69 318.46,702.69 402.12,619.02 402.12,323.75 564.87,161 1036.61,161 1074.61,199 1724.22,199 1772.2,246.98 R33.2 ; R33.2@1858.81,248.04 1938.46,248.04 R32.1
NetJ2_2: J2.2 J3.02 | length 260.8
  L1 (Signal) w11.81: J3.02 2501,520 2583,520 2654.06,591.06 J2.2@2722.51,591.06
NetJ2_4: J2.4 J3.04 | length 239.1
  L1 (Signal) w11.81: J3.04@2494,715 2615,715 2640.52,689.48 J2.4@2722.51,689.48
NetJ2_5: J2.5 J3.05 | length 260.4
  L1 (Signal) w11.81: J3.05@2494,815.66 2550.34,815.66 2627.31,738.69 J2.5@2722.51,738.69
NetJ2_6: J2.6 J3.06 | length 280.3
  L1 (Signal) w11.81: J3.06 2619.09,787.91 J2.6@2722.51,787.91
NetR16_2: R16.2 U1.92 | length 168.1
  L1 (Signal) w11.81: U1.92 2116.12,1002.88 2139,980 R16.2
NetR18_2: R18.2 U1.88 | length 183.4
  L1 (Signal) w11.81: U1.88 2047.12,924.42 2150.58,924.42 2174,901 R18.2
NRST: J4.05 U1.25 | length 2053.6
  L1 (Signal) w11.81: v2(1099,852) 1100.57,853.57 1134.43,853.57 1142.6,845.4 U1.25 ; v2(1534.01,1711.54) 1535.18,1711.54 1546.72,1700 1729.16,1700 1757.24,1728.08 J4.05
  L2 (Signal) w11.81: v2(1099,852) 997.33,953.67 944.33,953.67 874.56,1023.44 874.56,1584.56 1086,1796 1449.55,1796 v2(1534.01,1711.54)
"OSC IN": C36.2 U1.23 Y1.3 | length 288.3
  L1 (Signal) w11.81: Y1.3@919.83,865.09 Y1.3@923.77,865.09 ; Y1.3 1027.18,859.18 1052.77,884.77 U1.23
SPI1_MISO: C18.2 R28.2 U1.41 | length 554.2
  L1 (Signal) w11.81: R28.2 1337.16,131.74 1352.91,115.99 1377.51,115.99 C18.2@1390.31,103.2 ; U1.41 1357.12,548.82 1357.12,490.79 1373,474.91 v2(1373,443) ; v2(1386.37,161.27) 1386.37,159.05 1390.31,155.11 C18.2@1390.31,103.2 ; C18.2 C18.2@1390.31,103.2
  L2 (Signal) w11.81: v2(1373,443) 1374.57,441.43 1374.57,421.18 1386.37,409.38 v2@1386.37,166.27
SPI1_MOSI: C19.2 R32.2 U1.75 | length 830.3
  L1 (Signal) w11.81: R32.2 1998.57,243.04 2075.35,243.04 2159.04,243.04 2238.61,322.61 2238.61,364.22 2279,404.61 2279,600 2210.76,668.24 U1.75
SPI1_SCLK: C17.2 R26.2 U1.40 U1.74 | length 2119
  L1 (Signal) w11.81: R26.2 978.89,284.38 C17.2 1046.56,280.44 1108,219 1342,219 ; 1337.16,520.6 1337.16,402.49 v2(1338.3,401.35) ; v2@1345.57,252.43 v2(1344,254) 1344,221 1342,219 ; 2075.35,648.43 2199.57,648.43 2256,592 2256,469 2170,383 1919,383 1881,345 1802,345 1676,219 1342,219
  L2 (Signal) w11.81: v2(1338.3,401.35) 1338.3,399.13 1344,393.43 v2(1344,254)
SWCLK: J4.02 U1.109 | length 439.9
  L1 (Signal) w11.81: U1.109 1967.08,1622.96 2057.24,1713.12 J4.02
SWDIO: J4.04 U1.105 | length 1269.5
  L1 (Signal) w11.81: J4.04 1858.81,1801.7 1858.81,1869.02 1873.79,1884 2227.69,1884 2263,1848.69 2263,1312 2229,1278 2120,1278 2101.07,1259.07 2047.12,1259.07 U1.105
SWO: J4.06 U1.132 | length 641.1
  L1 (Signal) w11.81: v2(1410,1568) 1410,1496 1423,1483 1442,1464 1495,1464 1514.32,1444.68 U1.132 ; v2(1465.11,1711.54) 1553.69,1800.13 J4.06
  L2 (Signal) w11.81: v2(1410,1568) 1412.12,1568 1465.11,1620.99 v2(1465.11,1711.54)
UART1_OBC_RX: C1.2 R1.2 U1.116 | length 1385.6
  L1 (Signal) w11.81: R1.2 689.52,1606.34 809.74,1606.34 829.21,1625.81 1824.19,1625.81 1863,1587 1863,1516 1829.56,1482.56 U1.116@1829.56,1418.45
UART1_OBC_TX: C4.2 R3.2 U1.26 | length 951.2
  L1 (Signal) w11.81: R3.2 642.28,1357.21 C4.2 v2(648.18,1288.32) ; v2(731,1184) 845.03,1069.97 845.03,1045.86 ; v2(845,994) 845,1045.82 ; v2(1093,796) 1094.57,797.57 1105.57,797.57 1133.59,825.59 1169.83,825.59
  L2 (Signal) w11.81: v2(648.18,1288.32) 649.75,1286.75 649.75,1276.25 729.43,1196.57 729.43,1185.57 v2(731,1184) ; v2(845,994) 914.86,924.14 993.86,924.14 1065,853 1065,819 1071.92,812.08 1074.7,812.08 1090.78,796 v2(1093,796)
UART3_OBC_RX: C5.2 R5.2 U1.34 | length 1073.7
  L1 (Signal) w11.81: R5.2 624.56,1170.2 C5.2@626.53,1172.17 ; C5.2 C5.2@626.53,1172.17 ; U1.34 1061.76,668.24 1051.92,678.08 744.92,678.08 660,763 660,1109.17 638.34,1130.83 638.34,1161.35 627.51,1172.17 C5.2@626.53,1172.17
UART3_OBC_TX: C7.2 R7.2 U1.36 | length 259.3
  L1 (Signal) w11.81: R7.2 1016.29,628.87 C7.2 ; C7.2@1022.2,628.87 U1.36
UART4_OBC_RX: C9.2 R9.2 U1.67 | length 1089.5
  L1 (Signal) w11.81: R9.2 1065.5,422.17 1070.11,417.57 1101.89,417.57 1187.46,332 1483,332 1495,344 1767,344 1791,368 1831,368 1868.93,405.93 1868.93,548.82 U1.67
UART4_OBC_TX: C11.2 R12.2 U1.102 | length 387.5
  L1 (Signal) w11.81: U1.102 2164.27,1199.73 2184,1180 2210.82,1180 2229.41,1161.41 C11.2 ; C11.2@2346,1167.41 2414.85,1167.41 R12.2
USB_D_N: J5.2 U1.103 | length 862.3
  L1 (Signal) w9.84: U1.103@2046.84,1218.56 2246.62,1218.56 2488.22,1460.16 2751.71,1460.16 2766.27,1460.16 2768.06,1458.36 2802.73,1458.36 J5.2@2806.68,1454.41
USB_D_P: J5.3 U1.104 | length 859.9
  L1 (Signal) w9.84: U1.104@2046.84,1238.4 2238.4,1238.4 2480,1480 2759.92,1480 J5.3@2806.68,1480
pads on no net: J5. J5.4 J5.S1 J5.S2 J5.S3 J5.S4 U1.1 U1.2 U1.3 U1.4 U1.5 U1.7 U1.8 U1.9 U1.10 U1.11 U1.12 U1.13 U1.14 U1.15 U1.18 U1.19 U1.20 U1.21 U1.22 U1.24 U1.27 U1.28 U1.29 U1.30 U1.31 U1.32 U1.33 U1.35 U1.39 U1.42 U1.43 U1.44 U1.45 U1.46 U1.47 U1.50 U1.53 U1.54 U1.55 U1.56 U1.57 U1.60 U1.61 U1.62 U1.63 U1.64 U1.65 U1.66 U1.68 U1.69 U1.70 U1.72 U1.76 U1.77 U1.78 U1.79 U1.80 U1.81 U1.82 U1.85 U1.86 U1.87 U1.89 U1.90 U1.91 U1.93 U1.96 U1.97 U1.98 U1.99 U1.100 U1.101 U1.106 U1.110 U1.111 U1.112 U1.113 U1.114 U1.115 U1.117 U1.118 U1.119 U1.122 U1.123 U1.124 U1.125 U1.126 U1.131 U1.133 U1.134 U1.135 U1.136 U1.138 U1.139 U1.140 U1.141 U1.143

## Polygon pours and split planes (outlines as drawn)
GND on L2 (Signal) "BOTTOM GND" (solid, remove dead copper, pour order 4): 0,0 2952.76,0 2952.76,1929.13 0,1929.13
GND on L1 (Signal) "TOP GND" (solid, remove dead copper, pour order 3): 0,0 2952.76,0 2952.76,1929.13 0,1929.13
3V3 on L3 (PWR) (split plane): 2932.66,20.1 20.1,20.1 20.1,1909.04 2932.66,1909.04
GND on L2 (GND) (split plane): 2932.66,20.1 20.1,20.1 20.1,1909.04 2932.66,1909.04

## Silkscreen, mask and mechanical layers (free items; w line width, h text height)
Top Overlay:
  text "SWD CON" at 2303,1837 h40
  text "USB CON" at 2434,1681 h40
  text "OBC CON" at 30,1630 h40
  text "CON 2" at 2446,256 h40
Bottom Overlay:
  drawing of 20 lines, arcs and shapes, not listed
Mechanical 1:
  the board outline again, w10

## Text inside footprints (layer, text, board x,y; h text height)
D4: Top Overlay "K" at 2348,1093 h30 r270
D5: Top Overlay "K" at 2369,778 h30 r90
D6: Top Overlay "K" at 2173,1612 h40 r180
J5: Mechanical 13 "PCB EDGE" at 2951.17,1690.65 h24 r90
U1: Top Overlay "*" at 1134.09,1317.68 h50; Mechanical 13 "*" at 1227.59,1302.68 h50